# Altium PCB PCB Isolated gate driver module.PcbDoc
Units mm, origin at the board's own origin, x right, y up, seen from the top; angles counter-clockwise.
Board outline 33 x 20.5 mm, 4 copper layers (Top Layer, Gnd, Vcc, Bottom Layer), stack 1.945 mm thick; 30 components, 19 nets, 88 pads, 16 vias.
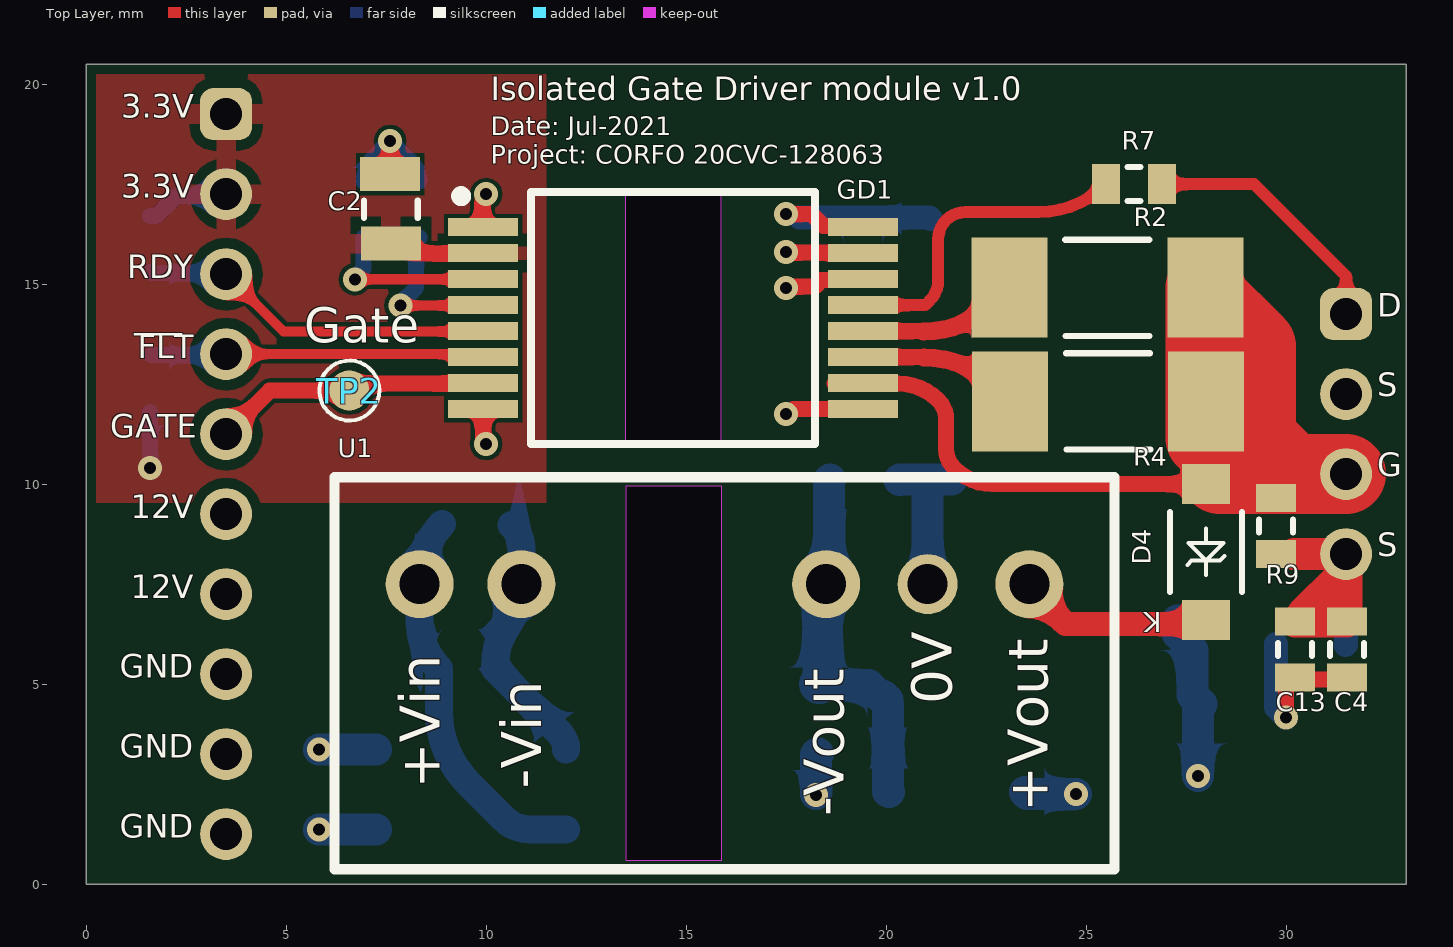
[diagram p0: Top Layer view]
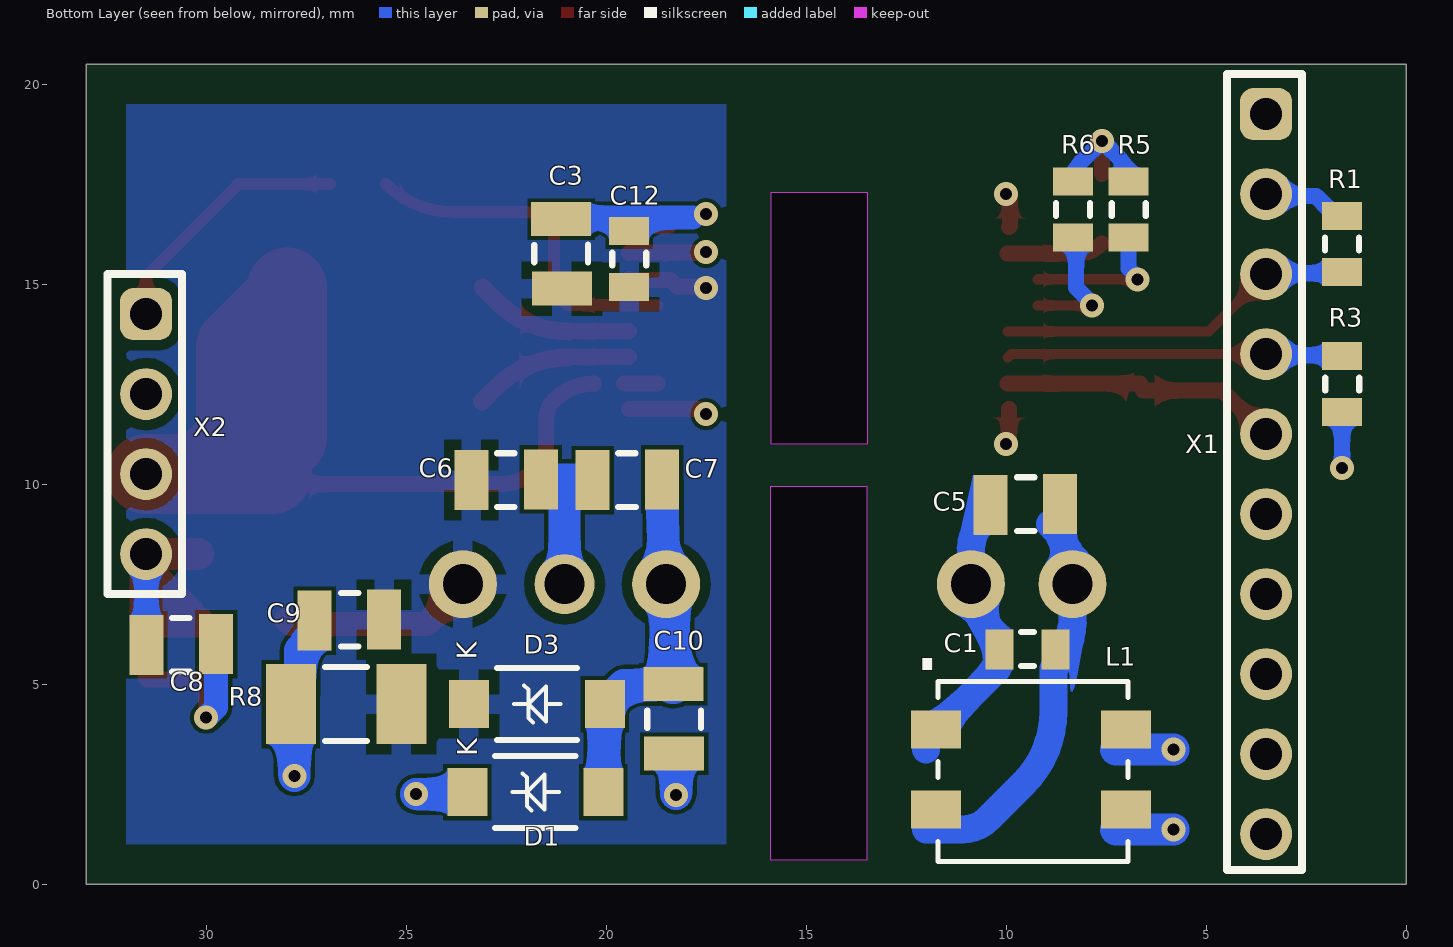
[diagram p1: Bottom Layer view, seen from below]
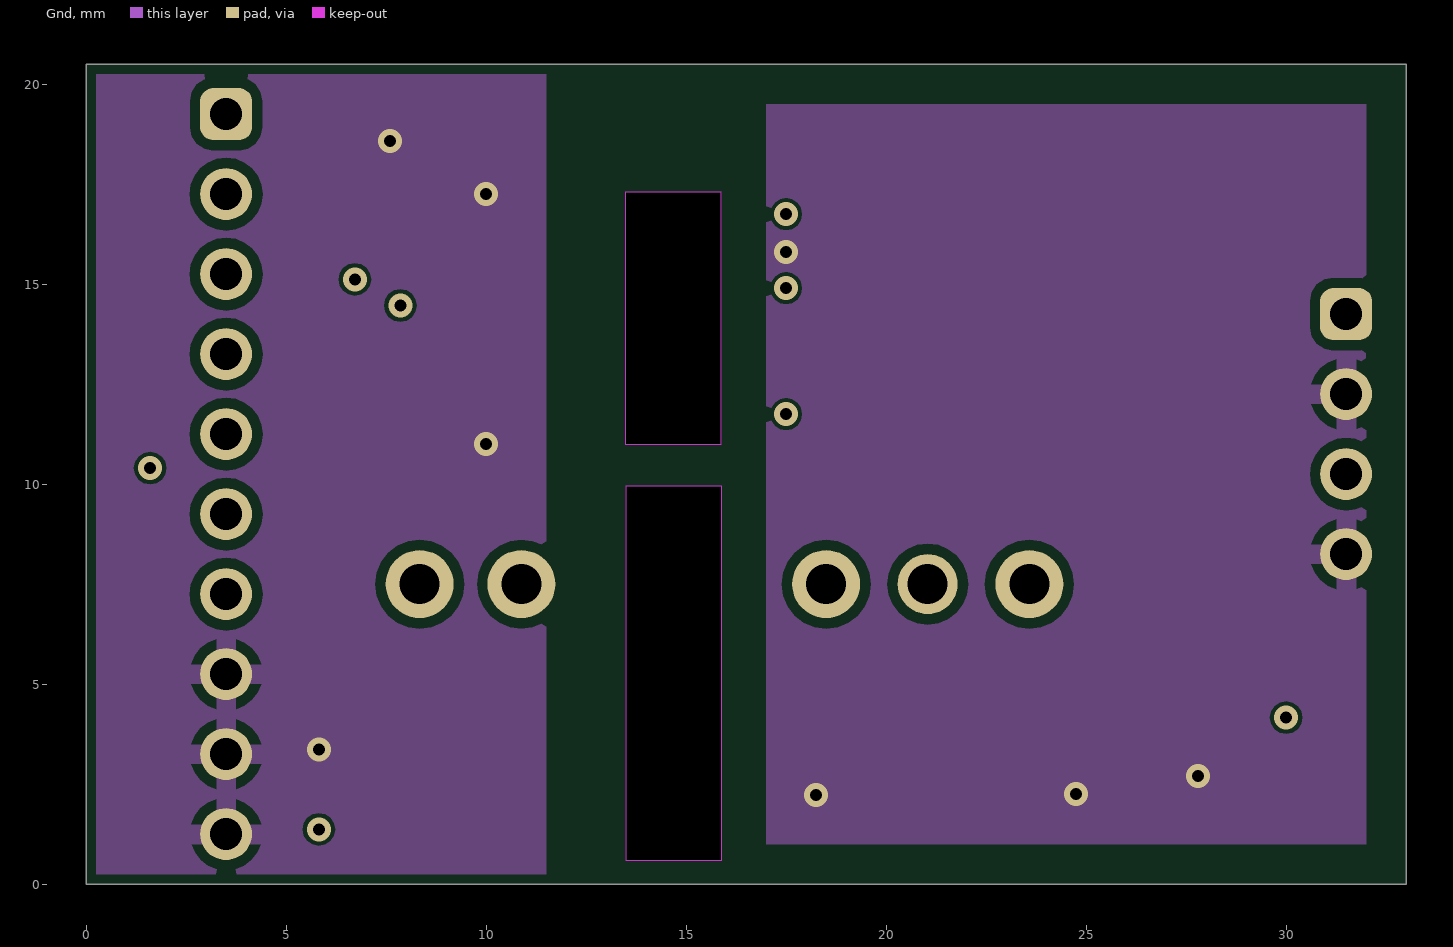
[diagram p2: Gnd]
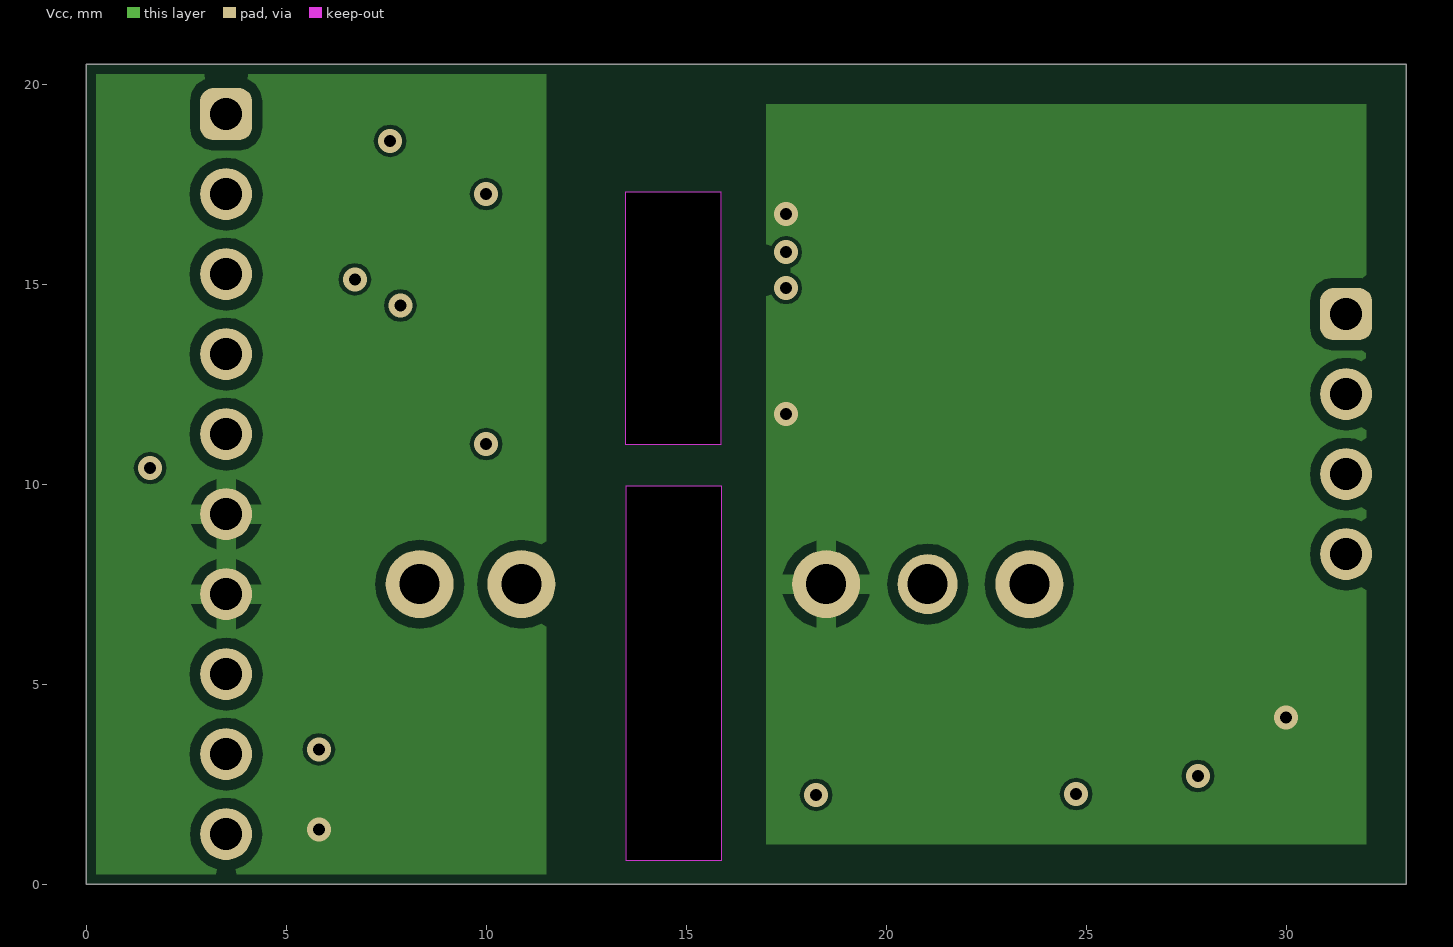
[diagram p3: Vcc]
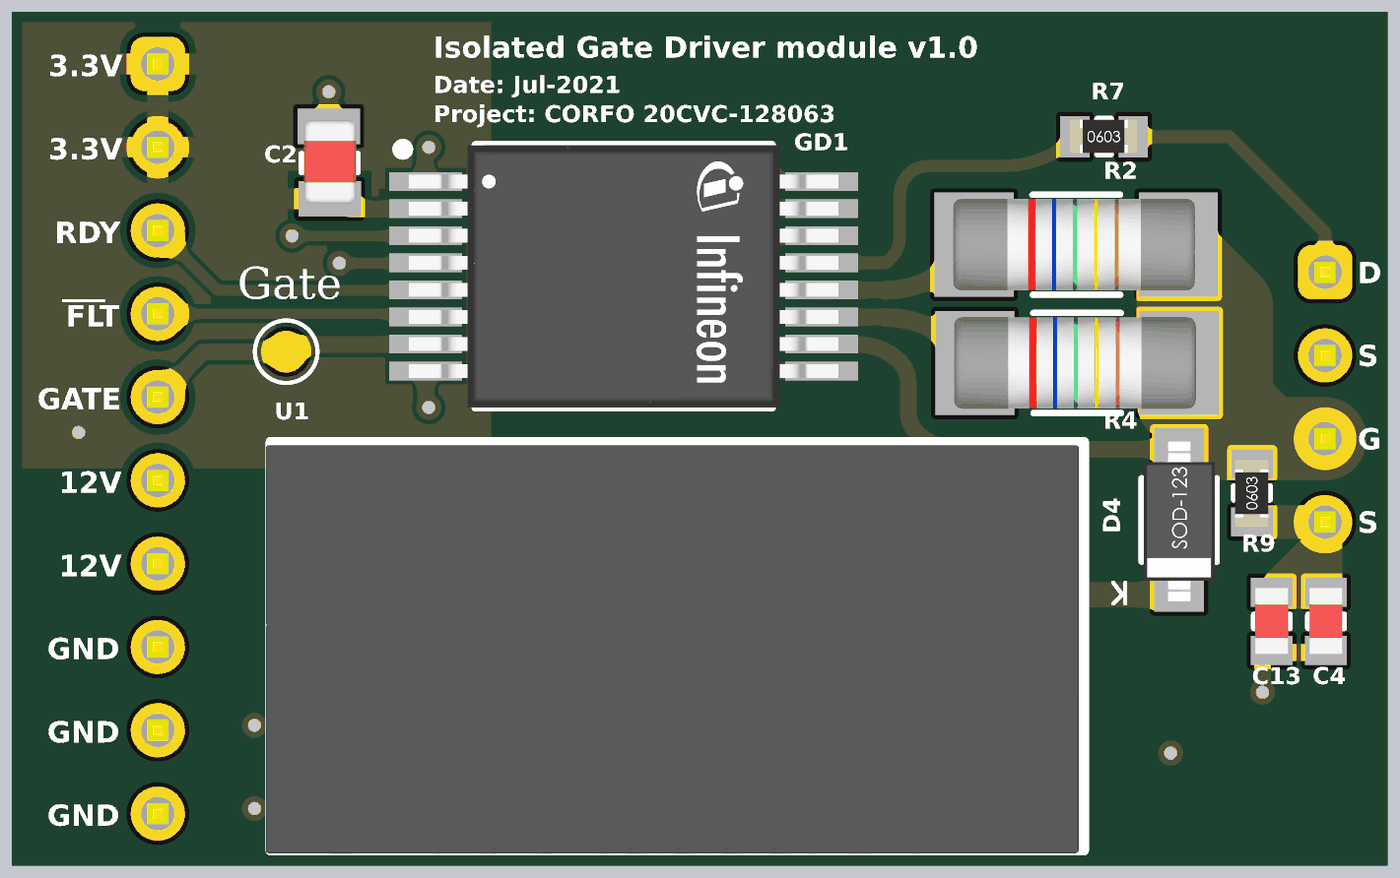
[diagram p4: 3D render of the assembled board from above, using the file's embedded part models]
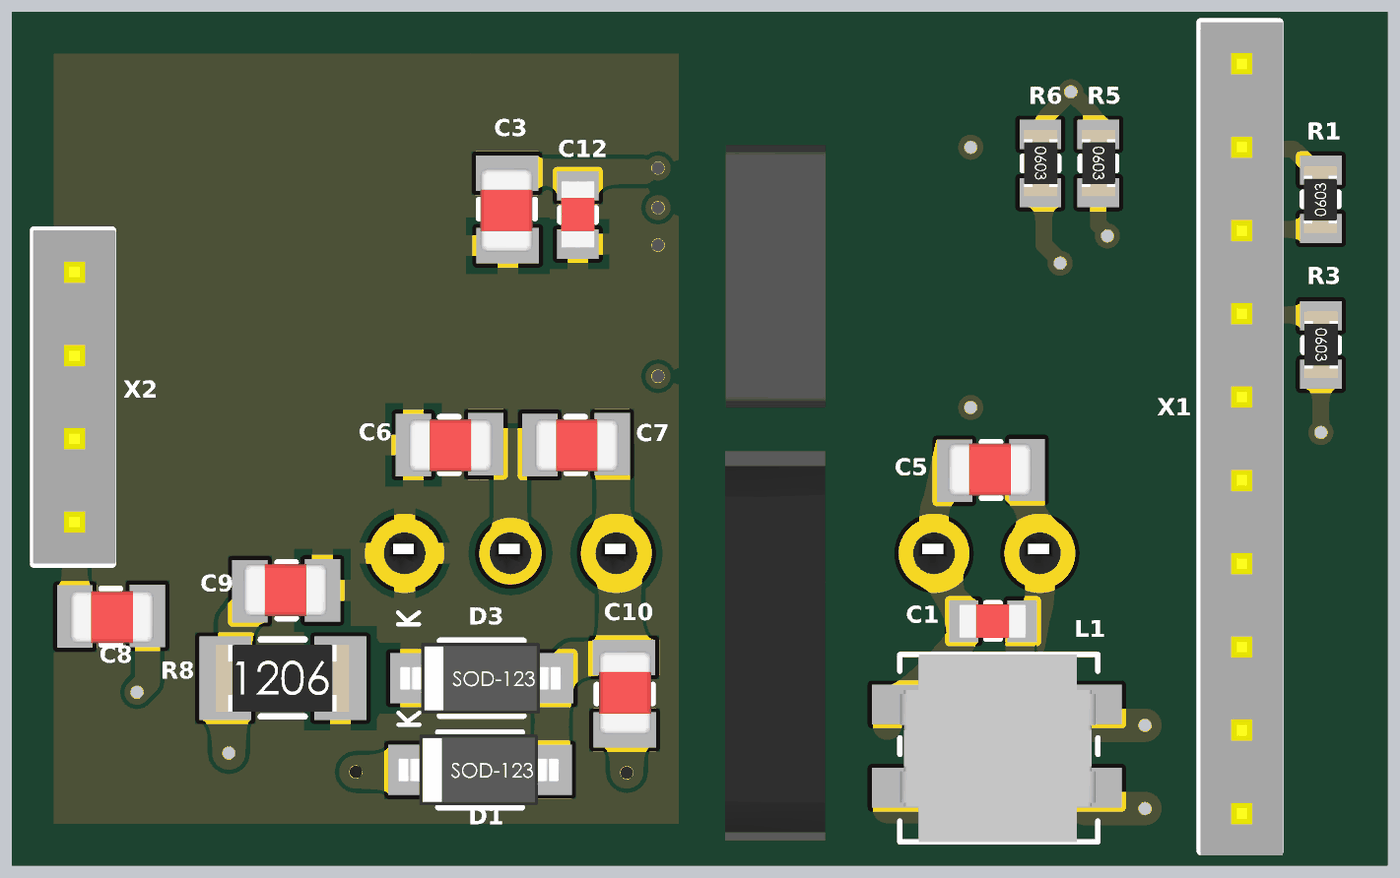
[diagram p5: 3D render of the assembled board from below, using the file's embedded part models]

## Layer stack, top to bottom
Top Solder: solder mask 0.0254, SM-003, Dk 4
Top Layer: signal copper 0.1067
Dielectric 1: core 0.254, FR-4, Dk 4.2
Gnd: signal copper 0.1067
Dielectric 3: prepreg 1.01, Dk 4.2
Vcc: signal copper 0.1067
Dielectric 2: core 0.254, FR-4, Dk 4.2
Bottom Layer: signal copper 0.1067
Bottom Solder: solder mask 0.0254, SM-003, Dk 4

## Board outline
0,0 33,0 33,20.5 0,20.5

## Design rules (kind name [scope] priority, off if disabled: settings)
Clearance [All] p1: gap=0.1 ignorepadtopadclearanceinfootprint=FALSE except(0.076: Arc-Via Track-Via Fill-Fill Fill-Poly Fill-Region Poly-Poly Poly-Region Region-Region; 0.127: Arc-Arc Arc-Track Track-Track SMDPad-SMDPad; 0.15: SMDPad-Text THPad-Text Via-Text; 0.2: Arc-SMDPad Arc-THPad Track-SMDPad Track-THPad SMDPad-THPad; 0.254: THPad-Fill THPad-Poly THPad-Region Via-Via)
ComponentClearance [All] p1: gap=0 collisioncheckmode=3 verticalgap=0 showdistances=FALSE
Height [All] p1: minheight=0 maxheight=100 prefheight=12.7
HoleSize [All] p1: absolutevalues=TRUE maxlimit=4 minlimit=0.2 maxpercent=80.000 minpercent=20.000
MinimumSolderMaskSliver [All] p1: minsoldermaskwidth=0.05
PolygonConnect GD_Chip [All vs HasFootprint('SOP65P1030X265-16N-1')] p1: thpad.connectstyle=Relief thpad.reliefconductorwidth=0.5 thpad.reliefentries=4 thpad.polygonreliefangle="90 Angle" thpad.airgapwidth=0.254 smdpad.connectstyle=Relief smdpad.reliefconductorwidth=0.35 smdpad.reliefentries=4 smdpad.polygonreliefangle="90 Angle" smdpad.airgapwidth=0.254 via.connectstyle=Relief via.reliefconductorwidth=0.5 via.reliefentries=4 via.polygonreliefangle="90 Angle" via.airgapwidth=0.254
PolygonConnect VIA [All vs IsVia] p2: connectstyle=Direct reliefconductorwidth=0.5 reliefentries=4 polygonreliefangle="90 Angle" airgapwidth=0.254
PolygonConnect [All] p3: connectstyle=Relief reliefconductorwidth=0.5 reliefentries=4 polygonreliefangle="90 Angle" airgapwidth=0.254
RoomDefinition GD1 [InComponentClass('GD1')] p1: confinementstyle=ConfineIn formatcopy=TRUE lockcomponents=FALSE outline -8.5,-7 58.41,-7 58.41,24 -8.5,24
RoutingVias [All] p1: holewidth=0.711 width=1.27 viastyle="Through Hole" minholewidth=0.711 minwidth=1.27 maxholewidth=0.711 maxwidth=1.27
SilkToSilkClearance [All] p1: silktosilkclearance=0
SilkToSolderMaskClearance [IsPad] p1: minsilkscreentomaskgap=0 clearancetoexposedcopper=TRUE
SolderMaskExpansion [All] p1: expansion=0.102 istentingtop=FALSE
Width [All] p1: maxlimit=4 minlimit=0.254 preferedwidth=0.5
24 further rules are at their usual default settings.

## Components (designator, comment, footprint, x,y, rotation, side; value= is the part's Value field where it differs from the comment)
C1 "100nF" CAP_0603 10.166,5.869 r90 bottom
C2 "1uF" CAP_0805 7.62,16.01 r180 top
C3 "2.2uF" CAP_0805 21.125,16.625 r180 bottom
C4 "10nF" CAP_0603 31.52,6.565 r0 top
C5 "1uF" CAP_0805 8.65,9.5 r270 bottom
C6 "1uF" CAP_0805 23.37,10.1 r90 bottom
C7 "1uF" CAP_0805 20.34,10.1 r90 bottom
C8 "4.7uF" CAP_0805 31.49,5.98 r90 bottom
C9 "2.2uF" CAP_0805 25.55,6.61 r270 bottom
C10 "2.2uF" CAP_0805 18.3,3.26 r0 bottom
C12 "100nF" CAP_0603 19.425,16.325 r180 bottom
C13 "100nF" CAP_0603 30.22,6.565 r0 top
D1 "3.3V" SOD-123 23.47,2.3 r90 bottom
D3 "20V" SOD-123 23.43,4.5 r90 bottom
D4 "Schottky" SOD-123 28,6.6 r180 top
GD1 "1ED3431MU12MXUMA1" SOP65P1030X265-16N-1 14.675,14.15 r0 top
L1 "1.4kOhm / 100MHz" CHOKE_CM_4.7X4.5MM 11.75,1.87 r180 bottom
R1 "2.2k" RES_0603 1.6,15.3 r0 bottom
R2 "12" RES_MMB_0207 27.98,14.91 r270 top
R3 "2.2k" RES_0603 1.6,13.2 r180 bottom
R4 "12" RES_MMB_0207 28,12.07 r270 top
R5 "1.91k" RES_0603 6.94,17.56 r180 bottom
R6 "13.7k" RES_0603 8.33,17.56 r180 bottom
R7 "1k" RES_0603 25.5,17.5 r90 top
R8 "2k" RES_1206 27.88,4.5 r90 bottom
R9 "10k" RES_0603 29.75,8.25 r180 top
TP2 "Gate" TP_1mm 6.58,12.34 r0 top
U1 "+12V ->+/-9V 2W" "DC//DC MEJ2D0509SC" 8.34,7.5 r0 top
X1 "GD to Half-Bridge Connector Male THT" TMM-110-01-G-S 3.5,10.25 r270 bottom
X2 "GD to Half-Bridge Connector Male THT" TMM-104-01-G-S 31.5,11.25 r270 bottom

## Footprints (in the part's own frame and the unit in brackets; to place one, negate y for a bottom-side part, rotate by r counter-clockwise, add the part's x,y. Pads: shape width x height; smd on the part's side, far side on the other; paste and mask are expansions set on the pad)
CAP_0603 [mm] "CAP CER 0603"
  rect 1x0.7 smd: 1(0,0) 2(0,-1.4)
  silkscreen extent -0.42,-0.86 0.43,-0.54, body extent -0.4,-1.49 0.4,0.11, height 0.3
CAP_0805 [mm] "CAP CER 0805"
  rect 1.5x0.85 smd: 1(0,0) 2(0.02,-1.74)
  silkscreen extent -0.67,-1.08 0.67,-0.64, body extent -0.63,-1.89 0.62,0.11, height 0.78
CHOKE_CM_4.7X4.5MM [mm] "CHOKE_CM_4.7x4.5mm"
  rect 1.25x0.95 smd: 1(0,2) 2(0,0) 3(4.75,0) 4(4.75,2)
  silkscreen extent 0.05,-1.3 4.8,3.2, body extent 0.05,-1.3 4.75,3.2, height 1.88
"DC//DC MEJ2D0509SC" [mm] "DC DC CONVERTER +/-9V 2W"
  round 1.7 hole 1: 1(0,0) 2(2.54,0) 5(10.16,0) 7(15.24,0)
  round 1.5 hole 1: 6(12.7,0)
  Keep-Out Layer board cut-out: 7.55,-6.9 7.55,2.45 5.15,2.45 5.15,-6.9
  silkscreen extent -2.13,-7.13 17.37,2.67, body extent -2.25,-7.22 17.25,2.6, height 12.5
RES_0603 [mm] "RES 0603"
  rect 1x0.7 smd: 1(0,0) 2(0,-1.4)
  silkscreen extent -0.42,-0.86 0.43,-0.54, body extent -0.39,-1.49 0.41,0.11, height 0.45
RES_1206 [mm] "RES 1206"
  rect 2x1.25 smd: 1(0,0) 2(0,-2.76)
  silkscreen extent -0.92,-1.9 0.93,-0.85, body extent -0.8,-2.97 0.8,0.23, height 0.55
RES_MMB_0207 [mm] "RES 1206"
  rect 2.5x1.9 smd: 1(0,0) 2(0,-4.9)
  silkscreen extent -1.2,-3.5 1.2,-1.39, body extent -1.1,-5.4 1.1,0.4, height 2.2
SOD-123 [mm] "SOD-123"
  rect 1.2x1 smd: A(0,-3.4) K(0,0)
  silkscreen extent -0.9,-2.7 0.9,-0.7, body extent -0.85,-3.59 0.85,0.26, height 1.42
SOP65P1030X265-16N-1 [mm] "SOP,0.65mm,pitch;16 pin,7.50mm W X 6.30mm L X 2.65mm H body"
  rect 1.75x0.45 smd paste+0 mask+0: 1(-4.75,2.275) 2(-4.75,1.625) 3(-4.75,0.975) 4(-4.75,0.325) 5(-4.75,-0.325) 6(-4.75,-0.975) 7(-4.75,-1.625) 8(-4.75,-2.275) 9(4.75,-2.275) 10(4.75,-1.625) 11(4.75,-0.975) 12(4.75,-0.325) 13(4.75,0.325) 14(4.75,0.975) 15(4.75,1.625) 16(4.75,2.275)
  Keep-Out Layer board cut-out: 1.2,-3.15 1.2,3.15 -1.2,3.15 -1.2,-3.15
  silkscreen extent -5.42,-3.15 3.55,3.17, body extent -5.15,-3.15 5.15,3.15, height 2.65
TMM-104-01-G-S [mm] "Connector Header Through Hole 4 position 0.079\" (2.00mm)"
  rrect50% 1.3x1.3 hole 0.8: 1(-3,0)
  round 1.3 hole 0.8: 2(-1,0) 3(1,0) 4(3,0)
  silkscreen extent -4,-0.97 4,0.9, body extent -4,-0.99 4,0.99, height 4.7
TMM-110-01-G-S [mm] "Connector Header Through Hole 10 position 0.079\" (2.00mm)"
  rrect50% 1.3x1.3 hole 0.8: 1(-9,0)
  round 1.3 hole 0.8: 2(-7,0) 3(-5,0) 4(-3,0) 5(-1,0) 6(1,0) 7(3,0) 8(5,0) 9(7,0) 10(9,0)
  silkscreen extent -10,-0.98 9.9,0.9, body extent -10,-0.99 10,0.99, height 4.7
TP_1mm [mm]
  round 1 smd paste-1: 1(0,0)
  silkscreen extent -0.75,-0.75 0.75,0.75

## Part data
C1 C12 C13: library part Cap_0603, "0.1µF ±10% 50V Ceramic Capacitor X7R 0603 (1608 Metric)", Package=0603, Supplier Part Number 1=399-5089-1-ND, Created=2020_06_15_DAarancibia, MF=KEMET, MFP=C0603C104K5RACTU, Supplier 1=Digi-Key
C2 C5 C6 C7: library part Cap_0805, "0.1µF ±10% 50V Ceramic Capacitor X7R 0805 (2012 Metric)", Package=0805, Supplier Part Number 1=399-7409-1-ND, Created=2020_06_15_DAarancibia, MF=KEMET, MFP=C0805C105K5RACTU, Supplier 1=Digi-Key
C3: library part Cap_0805, "0.1µF ±10% 50V Ceramic Capacitor X7R 0805 (2012 Metric)", Package=0805, Supplier Part Number 1=587-6358-1-ND, Created=2020_06_15_DAarancibia, MF="Taiyo Yuden", MFP=TMK212B7225MGHT, Supplier 1=Digi-Key
C4: library part Cap_0603, "±10% 50V Ceramic Capacitor X7R 0603 (1608 Metric)", Package=0603, Supplier Part Number 1=399-1091-1-ND, Created=2020_06_15_DAarancibia, MF=KEMET, MFP=C0603C103K5RACTU, Supplier 1=Digi-Key
C8: library part Cap_0805, "4.7 µF ±10% 50V Ceramic Capacitor X7R 0805 (2012 Metric)", Package=0805, Supplier Part Number 1=490-GRM21BZ71H475KE15LCT-ND, Created=2020_06_15_DAarancibia, MF="Murata Electronics", MFP=GRM21BZ71H475KE15L, Supplier 1=Digi-Key
C9 C10: library part Cap_0805, "2.2µF ±10% 50V Ceramic Capacitor X7R 0805 (2012 Metric)", Package=0805, Supplier Part Number 1=587-3169-1-ND, Created=2020_06_15_DAarancibia, MF=KEMET, MFP=UMK212BB7225KG-T, Supplier 1=Digi-Key
D1: library part Diode_Zener_3.3V, "Zener Diode 3.3V 500mW ±5% Surface Mount SOD-123", Package=SOD-123, Supplier Part Number 1=MMSZ5226BT1GOSCT-ND, Created=2020_07_28_DAarancibia, MF="ON Semiconductor", MFP=MMSZ5226BT1G, Supplier 1=Digi-Key
D3: library part Diode_Zener_20V, "Zener Diode 20V 500mW ±5% Surface Mount SOD-123", Package=SOD-123, Supplier Part Number 1=MMSZ5250B-TPMSCT-ND, Created=2020_07_28_DAarancibia, MF="Micro Commercial Co", MFP=MMSZ5250B-TP, Supplier 1=Digi-Key
D4: library part Diode_Schottky_30V/1A, "Diode Schottky 30 V 1A Surface Mount PG-SOD323-2", Package="SC-76, SOD-323", Supplier Part Number 1=BAS3010B03WE6327HTSA1CT-ND, Created=2021_05_16_EDuran, MF="Infineon Technologies", MFP=BAS3010B03WE6327HTSA1, Supplier 1=Digi-Key
GD1: library part 1ED3431MU12M, "3A Gate Driver Capacitive Coupling - Channel PG-DSO-16-28", Package=PG-DSO-16-28, Supplier Part Number 1=448-1ED3431MU12MXUMA1CT-ND, Created=2021_05_15_EDuran, MF="Infineon Technologies", MPN=1ED3431MU12MXUMA1, Supplier 1=Digi-Key
L1: library part Choke_CM_ACM4520, "2 Line Common Mode Choke Surface Mount 1.4 kOhms @ 100MHz 1.7A DCR 80mOhm", Package="4.70mm x 4.50mm", Supplier Part Number 1=445-6136-1-ND, Created=2020_07_28_DAarancibia, MF="TDK Corporation", MFP=ACM4520-142-2P-T000, Supplier 1=Digi-Key
R1 R3: library part Res_0603, "2.2 kOhms ±5% 0.1W, 1/10W Chip Resistor 0603 (1608 Metric) Moisture Resistant Thick Film", Package=0603, Supplier Part Number 1=CR0603-JW-222ELFCT-ND, Created=2020_06_15_DAarancibia, MF="Bourns Inc.", MFP=CR0603-JW-222ELF, Supplier 1=Digi-Key
R2 R4: library part Res_MELF_0207, "12 Ohms ±1% 1W Chip Resistor MELF, 0207 Anti-Sulfur, Automotive AEC-Q200 Thin Film", Package="MELF 0207", Supplier Part Number 1=749-1499-1-ND, Created=2020_06_15_DAarancibia, MF="Vishay Beyschlag", MFP=MMB02070C1209FB200, Supplier 1=Digi-Key
R5: library part Res_0603, "1.91 kOhms ±1% 0.1W, 1/10W Chip Resistor 0603 (1608 Metric) Moisture Resistant Thick Film", Package=0603, Supplier Part Number 1=311-1.91KHRCT-ND, Created=2020_06_15_DAarancibia, MF=Yageo, MFP=RC0603FR-071K91L, Supplier 1=Digi-Key
R6: library part Res_0603, "13.7 kOhms ±1% 0.1W, 1/10W Chip Resistor 0603 (1608 Metric) Automotive AEC-Q200 Thick Film", Package=0603, Supplier Part Number 1=RMCF0603FT13K7CT-ND, Created=2020_06_15_DAarancibia, MF="Stackpole Electronics Inc", MFP=RMCF0603FT13K7, Supplier 1=Digi-Key
R7: library part Res_0603, "1 kOhms ±5% 0.25W, 1/4W Chip Resistor 0603 (1608 Metric) Automotive AEC-Q200, Pulse Withstanding Thick Film", Package=0603, Supplier Part Number 1=YAG6166CT-ND, Created=2020_06_15_DAarancibia, MF=Yageo, MFP=SR0603JR-7T1KL, Supplier 1=Digi-Key
R8: library part Res_1206, "2 kOhms ±0.1% 0.25W, 1/4W Chip Resistor 1206 (3216 Metric) - Thin Film", Package=1206, Supplier Part Number 1=YAG5062CT-ND, Created=2020_06_15_DAarancibia, MF=Yageo, MFP=RT1206BRD072KL, Supplier 1=Digi-Key
R9: library part Res_0603, "10 kOhms ±5% 0.1W, 1/10W Chip Resistor 0603 (1608 Metric) Moisture Resistant Thick Film", Package=0603, Supplier Part Number 1=YAG1309CT-ND, Created=2020_06_15_DAarancibia, MF=Yageo, MFP=RC0603JR-0710KP, Supplier 1=Digi-Key
TP2: "Testpoint 1mm", Created=2018_06_25_AGeiger
U1: library part "DC//DC MEJ2D1209SC", "Isolated Module DC DC Converter 2 Output 9V -9V - 111mA, 111mA 10.8V - 13.2V Input", MPN=MEJ2D1209SC, Package="7-SIP Module, 5 Leads", Supplier Part Number 1=811-2407-ND, Created=2021_05_17_EDuran, MF="Murata Power Solutions Inc.", Supplier 1=Digi-Key
X1: library part Con_Header_Male_6, "Connector Header Through Hole 10 position 0.079\" (2.00mm)", MPN=TMM-110-01-G-S, Package="Through Hole, pitch 0.079\" (2.00mm)", Supplier Part Number 1=SAM1174-10-ND, Created=2021_05_24_EDuran, MF="Samtec Inc.", Supplier 1=Digi-Key
X2: library part Con_Header_Male_5, "Connector Header Through Hole 4 position 0.079\" (2.00mm)", MPN=TMM-104-01-G-S, Package="Through Hole, pitch 0.079\" (2.00mm)", Supplier Part Number 1=SAM1174-04-ND, Created=2021_05_24_EDuran, MF="Samtec Inc.", Supplier 1=Digi-Key

## Via types
v1: diameter 0.6, hole 0.3, Top Layer to Bottom Layer, tented both sides, 16 vias

## Nets (pads, with @x,y where several pads share a name; then routed paths per layer and width w, separated by ;. In a path a pad name is that pad's centre, name@x,y a point inside that pad or via, vN(x,y) a via of type N, cw(c..) or ccw(c..) an arc to the next point about the centre after c; other vN are vias at no path point)
3.3V: C2.1 GD1.2 R1.2 R3.2 X1.1 X1.2 | length 5.9
  Top Layer w0.4: C2.1 ccw(c8.211,16.601) 8.211,15.765 GD1.2@9.96,15.765
  Bottom Layer w0.4: v1(1.6,10.4) R3.2 ; R1.2 1.75,16.7 2.25,17.2 3.45,17.2 X1.2
12V: L1.3 X1.6 X1.7 | length 1.4
  Bottom Layer w0.8: v1(5.82,1.37) 7.25,1.37
+15V_ISO: C3.2 C6.1 C9.1 C12.2 D3.K D4.K GD1.14 R8.2 U1.7 | length 6.8
  Top Layer w0.4: v1@17.458,14.9 17.496,14.938 18.223,14.938 18.384,15.1 19.4,15.1 GD1.14
  Top Layer w0.6: U1.7@23.58,7 23.671,7.091 23.89,7.091 24.481,6.5 27.9,6.5 D4.K
  other v1: 17.5,14.9
-3.3V_ISO: C3.1 C4.2 C7.2 C8.2 C10.2 C12.1 C13.2 D1.A D3.A GD1.9 GD1.16 U1.5 | length 21.2
  Top Layer w0.4: v1(17.5,11.75) 17.554,11.75 17.679,11.875 GD1.9 ; v1(17.5,16.75) 18.138,16.75 18.438,16.45 19.4,16.45 GD1.16 ; v1(30,4.163) 30,5.015 30.103,5.118 31.473,5.118 C4.2
  Bottom Layer w0.6: 17.838,16.663 21.088,16.663 C3.1 ; C8.2 29.75,4.413 v1(30,4.163)
  Bottom Layer w0.8: C10.2 18.345,4.975 19.555,4.975 19.83,4.7 19.93,4.7 20.03,4.6 D3.A 20.05,4.48 20.05,2.32 D1.A ; U1.5 18.575,7.575 18.575,10.095 C7.2
  Bottom Layer w1: C10.2 18.335,5 18.41,5.075 18.41,7.41 U1.5
Drain: R7.2 X2.1 | length 6.5
  Top Layer w0.3: R7.2 29.2,17.5 31.5,15.2 X2.1
Fault: GD1.6 R3.1 X1.4 | length 8.4
  Top Layer w0.254: X1.4 7.415,13.25 9.875,13.25 GD1.6@9.96,13.165
  Bottom Layer w0.254: R3.1 R3.1@1.625,13.225 ; X1.4@3.475,13.225 X1.4
  Bottom Layer w0.4: R3.1@1.625,13.225 X1.4@3.475,13.225
GND1: C2.2 GD1.1 GD1.8 L1.4 R5.1 R6.1 X1.8 X1.9 X1.10 | length 6.6
  Top Layer w0.4: C2.2 v1(7.6,18.58) ; GD1.8 9.925,11.129 10,11.054 v1(10,11) ; GD1.1 9.925,16.432 9.907,16.45 9.907,17.103 10,17.196 v1(10,17.25)
  Bottom Layer w0.4: R5.1 cw(c7.809,17.56) 7.195,18.175 v1(7.6,18.58) 8.125,18.055 cw(c7.63,17.56) R6.1
  Bottom Layer w0.8: v1(5.82,3.37) 7.25,3.37
IN: GD1.7 TP2.1 X1.5 | length 7
  Top Layer w0.4: X1.5 4.59,12.34 TP2.1 6.651,12.511 9.956,12.511 GD1.7@9.96,12.515
NetC1_1: C1.1 C5.2 L1.1 U1.2 | length 6.6
  Bottom Layer w0.7: C5.2@10.64,8.98 cw(c10.061,8.401) 10.88,8.401 10.88,7 ccw(c12.473,5.407) 10.22,5.407 10.22,5.39 11.83,3.78 cw(c11.421,3.37) 12,3.37
NetC1_2: C1.2 C5.1 L1.2 U1.1 | length 9.8
  Bottom Layer w0.7: C5.1@8.9,9 ccw(c10.252,7.648) 8.34,7.648 8.34,7 8.34,6.549 ccw(c9.979,6.549) 8.82,5.39 8.82,4.312 ccw(c11.36,4.312) 9.564,2.516 10.44,1.64 ccw(c11.092,2.292) 11.092,1.37 12,1.37
NetC6_2: C6.2 C7.1 U1.6 | length 3.9
  Bottom Layer w0.8: C7.1 20.35,10.11 21.04,10.11 ; U1.6 21.04,10.11 ; C6.2 21.62,10.11 21.04,10.11
NetGD1_3: GD1.3 R5.2 | length 3.6
  Top Layer w0.254: v1(6.72,15.12) 9.205,15.12 GD1.3@9.21,15.115
  Bottom Layer w0.4: v1(6.72,15.12) 6.72,15.174 6.94,15.394 R5.2
NetGD1_4: GD1.4 R6.2 | length 3.2
  Top Layer w0.254: v1(7.855,14.465) GD1.4@9.21,14.465
  Bottom Layer w0.4: v1(7.855,14.465) 7.855,14.519 8.25,14.914 8.25,16.08 R6.2
NetGD1_11: GD1.11 R4.2 | length 4
  Top Layer w0.4: GD1.11 20.943,13.175 20.953,13.165
  Top Layer w0.45: 20.953,13.165 cw(c20.953,10.625) 22.749,12.421 R4.2
NetGD1_12: GD1.12 R2.2 | length 4
  Top Layer w0.4: GD1.12 20.923,13.825 20.933,13.815
  Top Layer w0.45: 20.933,13.815 ccw(c20.933,16.355) 22.729,14.559 R2.2
NetGD1_13: GD1.13 R7.1 | length 9.4
  Top Layer w0.3: GD1.13@18.71,14.465 GD1.13@20.024,14.465 ; GD1.13 20.975,14.475 21.1,14.6 ccw(c20.617,15.083) 21.3,15.083 21.3,16.117 cw(c21.983,16.117) 21.5,16.6 cw(c21.983,16.117) 21.983,16.8 23.81,16.8 ccw(c23.81,19.19) R7.1
PWR_Gate: D4.A GD1.10 R2.1 R4.1 R9.2 X2.3 | length 23.7
  Top Layer w0.4: GD1.10@18.71,12.515 GD1.10@19.548,12.515 ; GD1.10@20.298,12.515 cw(c20.298,11.098) 21.3,12.1 ; 21.3,12.1 cw(c20.817,11.617) 21.5,11.617 21.5,10.883 ccw(c22.183,10.883) 21.7,10.4 ccw(c22.666,11.366) 22.666,10 D4.A@27.98,10
  Top Layer w2: R4.1@27.98,11.147 R2.1@27.98,14.71 ; R2.1 R2.1@27.98,14.71 ; X2.3 30.147,10.25 ; R2.1@27.98,14.71 29.25,13.44 29.25,11.147 ; 29.25,11.147 28.353,10.25 30.147,10.25 ; 29.25,11.147 30.147,10.25
Ready: GD1.5 R1.1 X1.3 | length 9
  Top Layer w0.254: X1.3 4.935,13.815 GD1.5@9.96,13.815
  Bottom Layer w0.4: R1.1 1.625,15.275 3.475,15.275 X1.3
Source: C4.1 C8.1 C9.2 C10.1 C13.1 D1.K GD1.15 R8.1 R9.1 X2.2 X2.4 | length 17.2
  Top Layer w0.4: v1@17.458,15.8 17.47,15.787 19.413,15.787 GD1.15
  Top Layer w0.8: R9.1@30.2,8.25 X2.4 31.366,8.116 31.366,7.711 30.42,6.765 30.42,6.615 C13.1@30.37,6.565 ; C13.1 C13.1@30.37,6.565 ; X2.4@31.51,8.24 31.51,6.575 C4.1 C13.1@30.37,6.565
  Bottom Layer w0.6: C8.1 31.495,5.985 31.495,8.245 X2.4
  Bottom Layer w0.8: v1@18.25,2.25 18.25,3.235 18.275,3.26 C10.1 ; D1.K 23.52,2.25 v1(24.75,2.25) ; C9.2 27.29,6.265 27.5,6.055 27.5,6 27.655,5.845 27.655,4.725 R8.1 27.796,4.416 v1(27.796,2.703)
  other v1: 18.25,2.23 17.5,15.8

## Polygon pours and split planes (outlines as drawn)
-3.3V_ISO on Vcc "-3.3V_ISO_L03_P004" (solid, pour order 4): 32,19.5 32,1 17,1 17,19.5
12V on Vcc "12V_L03_P002" (solid, pour order 2): 11.5,20.25 0.25,20.25 0.25,0.25 11.5,0.25
Source on Gnd "SOURCE_L02_P011" (solid, pour order 11): 32,19.5 32,1 17,1 17,19.5
GND1 on Gnd "GND1_L02_P003" (solid, pour order 3): 0.25,20.25 0.25,0.25 11.5,0.25 11.5,20.25
3.3V on Top Layer "3.3V_L01_P017" (solid, pour order 17): 0.25,20.25 11.5,20.25 11.5,9.53 0.25,9.53
+15V_ISO on Bottom Layer "+15V_ISO_L04_P015" (solid, pour order 15): 32,19.5 32,1 17,1 17,19.5

## Silkscreen, mask and mechanical layers (free items; w line width, h text height)
Top Overlay:
  text "Isolated Gate Driver module v1.0" at 10.11,19.4 h1
  text "3.3V" at 0.875,18.959 h1
  text "Date: Jul-2021" at 10.11,18.554 h0.8
  text "Project: CORFO 20CVC-128063" at 10.11,17.85 h0.8
  text "3.3V" at 0.875,16.959 h1
  text "RDY" at 1.026,14.952 h1
  text "D" at 32.279,13.986 h1
  text "___" at 1.197,13.696 h1
  text "FLT" at 1.294,12.949 h1
  text "S" at 32.279,11.995 h1
  text "GATE" at 0.607,10.959 h1
  text "G" at 32.279,9.995 h1
  text "12V" at 1.119,8.952 h1
  text "S" at 32.279,7.995 h1
  text "12V" at 1.119,6.952 h1
  text "GND" at 0.845,4.959 h1
  text "GND" at 0.845,2.959 h1
  text "GND" at 0.845,0.959 h1
M1 Outline:
  the board outline again, w0.2

## Dimensions
0,0 to 0,20.5 on M2 Dimensions
0,0 to 33,0 on M2 Dimensions

## Text inside footprints (layer, text, board x,y; h text height)
D1: Bottom Overlay "K" at 23.22,3.2 h0.5 r270
D3: Bottom Overlay "K" at 23.23,5.61 h0.5 r270
D4: Top Overlay "K" at 26.89,6.8 h0.5 r180
U1: Top Overlay "-Vout" at 18.94,1.7 h1 r90; Top Overlay "+Vout" at 24.04,1.8 h1 r90; Top Overlay "-Vin" at 11.38,2.39 h1 r90; Top Overlay "+Vin" at 8.84,2.39 h1 r90; Top Overlay "0V" at 21.64,4.5 h1 r90